# Altium PCB PCB_rp2040ArtDriver_2022-06-08.pcbdoc
Units mil, origin at the board's own origin, x right, y up, seen from the top; angles counter-clockwise.
Board outline 3205 x 2595 mil, 2 copper layers (Top Layer, Bottom Layer); 5 components, 12 nets, 41 pads, 7 vias.
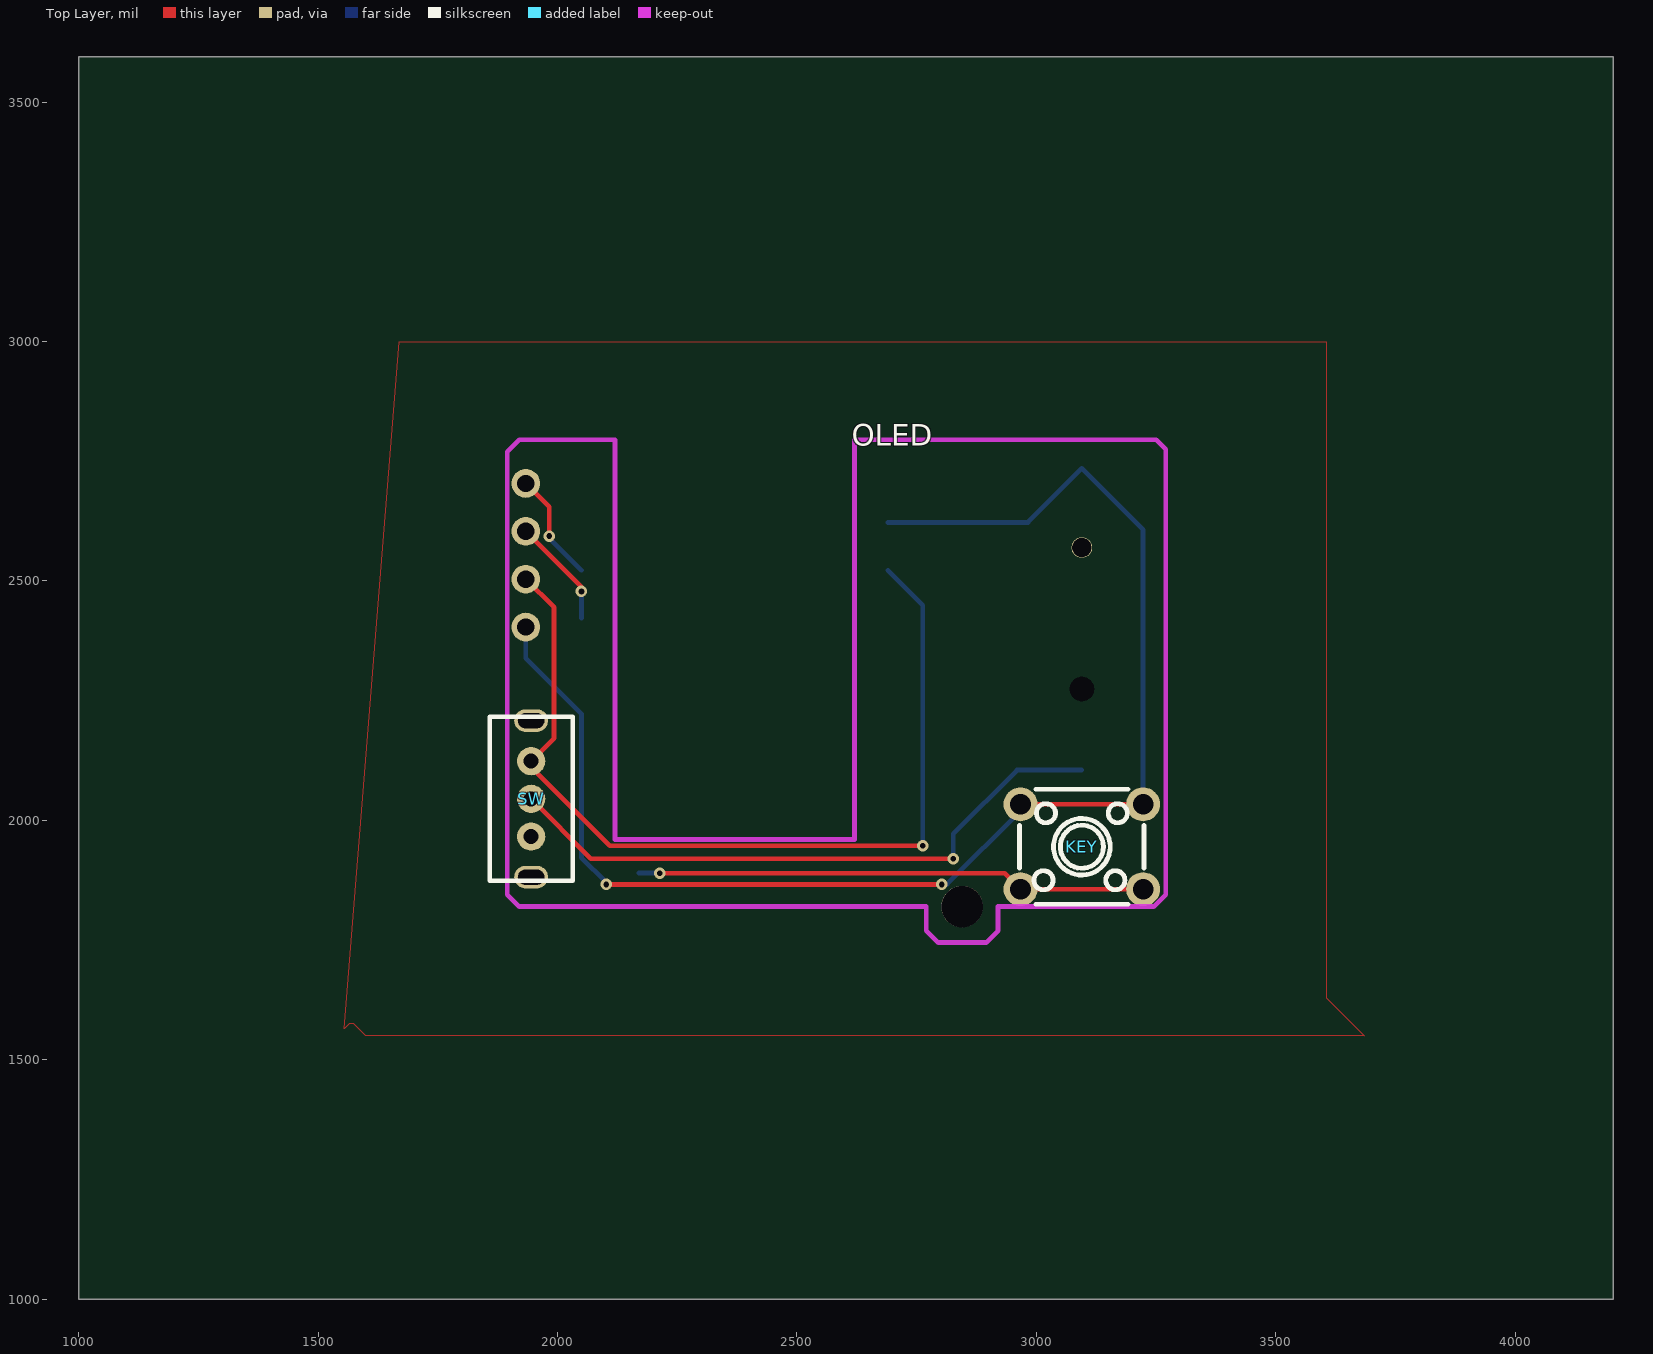
[diagram p0: Top Layer view]
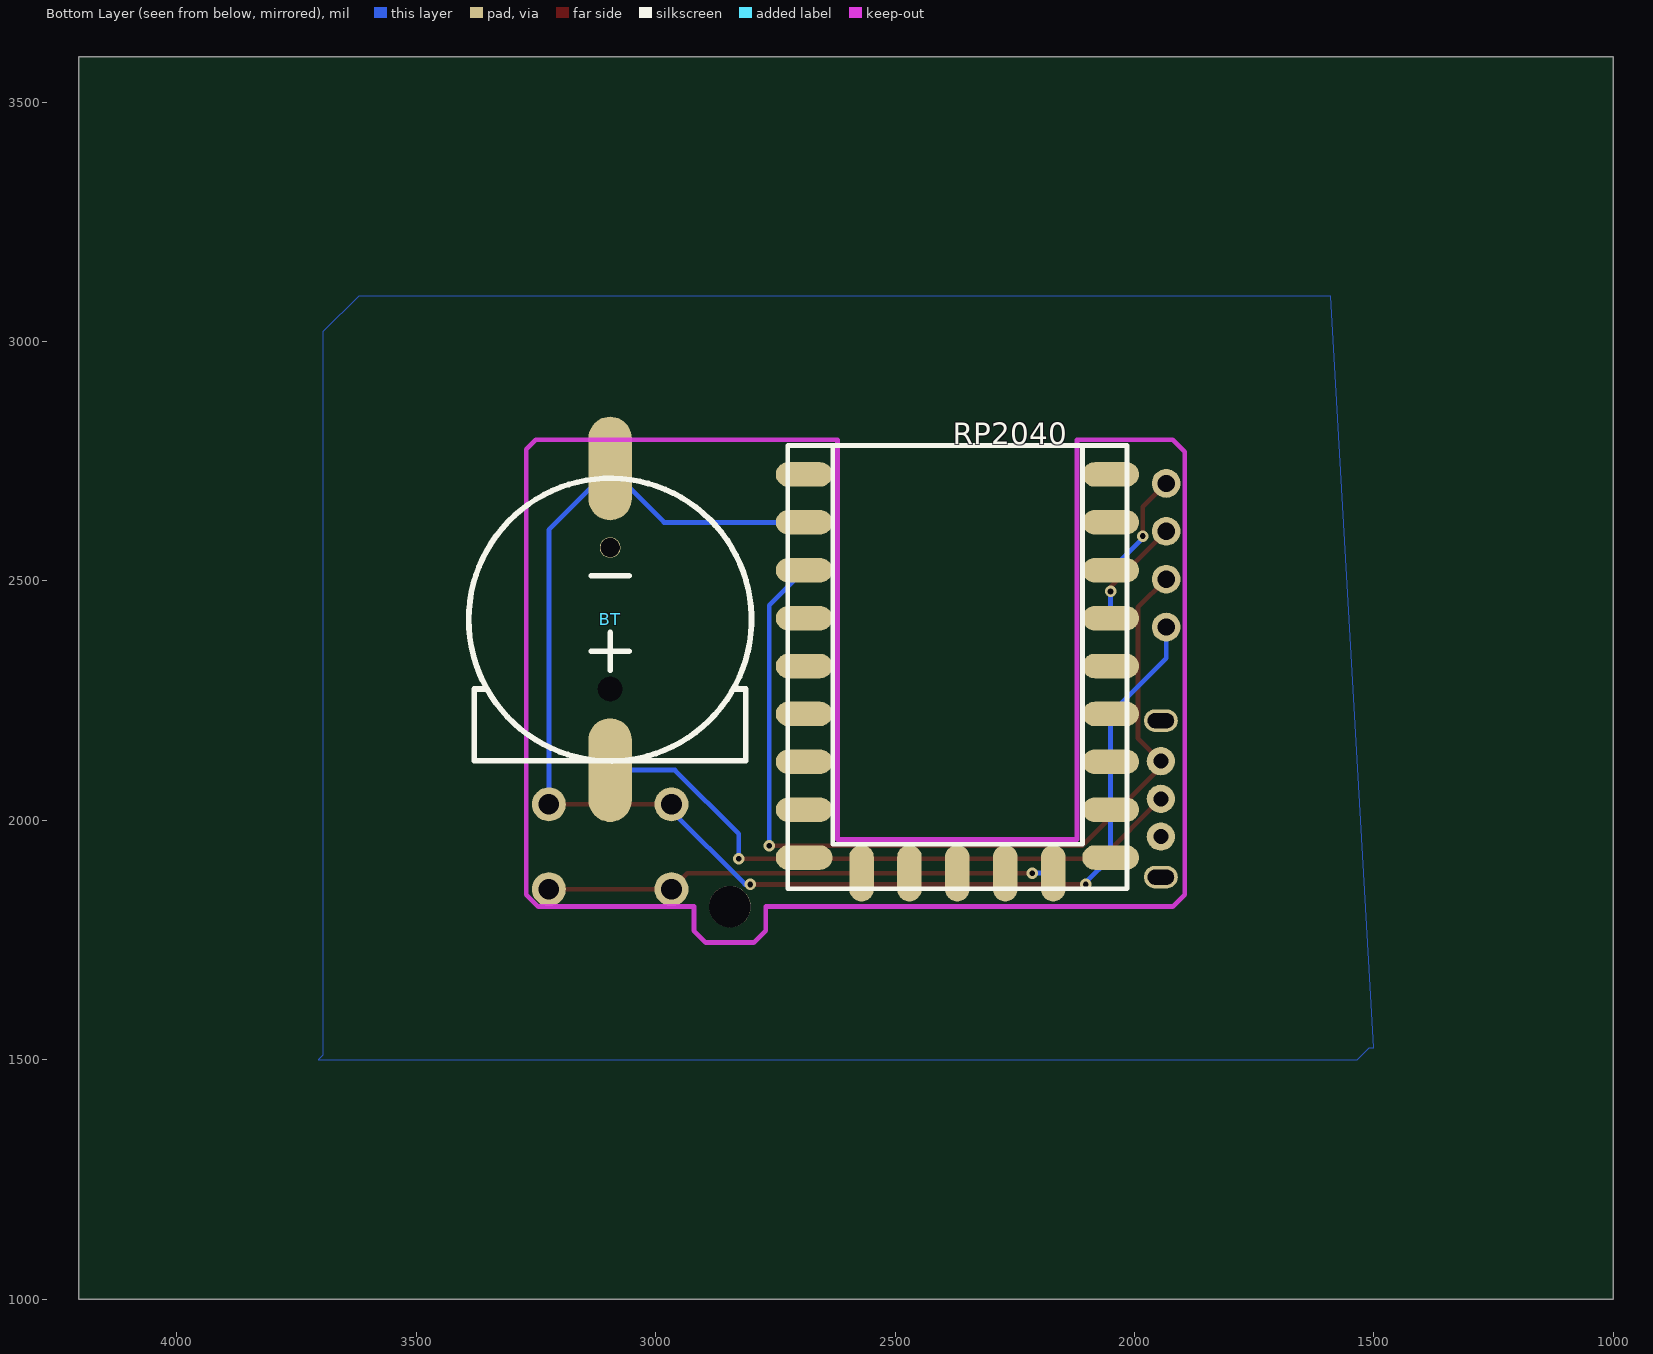
[diagram p1: Bottom Layer view, seen from below]

## Layer stack, top to bottom
Top Layer: signal copper (thickness not stored)
Dielectric: dielectric 12.6, FR-4, Dk 4.8
Bottom Layer: signal copper (thickness not stored)

## Board outline
4205,1000 1000,1000 1000,3595 4205,3595

## Components (designator, comment, footprint, x,y, rotation, side; value= is the part's Value field where it differs from the comment)
BT "BS-1220-2" BS-1220-2 3095,2420 r90 bottom
KEY "K4-6×6_TH" KEY-TH_4P-L6.0-W6.0-P4.50-LS6.5 3095,1945 r0 top
OLED "0.91OLED-4P-IIC" OLED-0.91-2.54*4P-IIC 2595,2595 r0 top
RP2040 "RP2040-Zero" RP2040-ZERO 2370,2320 r0 bottom
SW "SS-12D07G3" "J-SS 12D07" 1945,2045 r0 top

## Footprints (in the part's own frame and the unit in brackets; to place one, negate y for a bottom-side part, rotate by r counter-clockwise, add the part's x,y. Pads: shape width x height; smd on the part's side, far side on the other; paste and mask are expansions set on the pad)
BS-1220-2 [mm]
  oval 5.5x2.3 smd: 1(-8,0) 2(8,0)
  round 1.1 hole 1.3 slot 1.305 at 0 deg unplated: 3(-3.7,0)
  round 1.1 hole 1 slot 1.005 at 0 deg unplated: 4(3.8,0)
  silkscreen extent -7.52,-7.5 7.48,7.5
"J-SS 12D07" [mm]
  round 1.5 hole 0.8: 1(0,1.999) 2(0,0) 3(0,-1.999)
  oval 1.8x1.2 hole 0.8 slot 1.4 at 0 deg: ""(0,-4.15) ""(0,4.15)
  silkscreen extent -2.2,-4.35 2.2,4.35
KEY-TH_4P-L6.0-W6.0-P4.50-LS6.5 [mm]
  round 1.8 hole 1.1: 1(-3.251,-2.25) 2(3.251,-2.25) 3(3.251,2.25) 4(-3.251,2.25)
  silkscreen extent -3.3,-3.05 3.3,3.05
OLED-0.91-2.54*4P-IIC [mil]
  round 60 hole 35.83: 1(-661.1,-191.26) 2(-661.1,-91.26) 3(-661.1,8.74) 4(-661.1,108.74)
RP2040-ZERO [mm]
  oval 3x1.3 smd: 1(-8.128,-10.221) 2(-8.128,-7.681) 3(-8.128,-5.141) 4(-8.128,-2.601) 5(-8.128,-0.061) 6(-8.128,2.479) 7(-8.128,5.019) 8(-8.128,7.559) 9(-8.128,10.099) 15(8.128,10.099) 16(8.128,7.559) 17(8.128,5.019) 18(8.128,2.479) 19(8.128,-0.061) 20(8.128,-2.601) 21(8.128,-5.141) 22(8.128,-7.681) 23(8.128,-10.221)
  oval 1.3x3 smd: 10(-5.08,10.922) 11(-2.54,10.922) 12(0,10.922) 13(2.54,10.922) 14(5.08,10.922)
  silkscreen extent -9,-11.75 9,11.75

## Free pads (board coordinates)
  round 86.61 hole 86.61 unplated: ""(2845,1820)

## Via types
v1: diameter 23.98, hole 12.01, Top Layer to Bottom Layer, tented both sides, 7 vias

## Nets (pads, with @x,y where several pads share a name; then routed paths per layer and width w, separated by ;. In a path a pad name is that pad's centre, name@x,y a point inside that pad or via, vN(x,y) a via of type N, cw(c..) or ccw(c..) an arc to the next point about the centre after c; other vN are vias at no path point)
GND: BT.2 KEY.3 KEY.4 OLED.1 RP2040.6 RP2040.7 RP2040.8 RP2040.9 RP2040.22 | length 3011.3
  Top Layer w10: v1(2101.69,1866.36) v1(2802.58,1866.36) ; KEY.4 KEY.3
  Bottom Layer w10: OLED.1 1933.9,2338.49 RP2040.6 RP2040.7 RP2040.8 RP2040.9 2101.69,1870.7 v1(2101.69,1866.36) ; RP2040.22 2982.43,2622.39 BT.2 3223,2606.96 KEY.3 ; v1(2802.58,1866.36) 2813.14,1866.36 2967,2020.22 KEY.4
KEY1: KEY.1 KEY.2 RP2040.10 | length 1066.9
  Top Layer w10: v1(2213.6,1889.8) 2933.6,1889.8 KEY.1 KEY.2
  Bottom Layer w10: RP2040.10 2213.41,1889.99 v1(2213.6,1889.8)
S$1804: 
S$1817: 
S$1830: 
S$1834: 
S$13528: 
S$13532: 
SCL: OLED.3 RP2040.4 | length 229.4
  Top Layer w10: OLED.3 2050,2487.64 v1(2050,2478.26)
  Bottom Layer w10: RP2040.4 v1(2050,2478.26)
SDA: OLED.4 RP2040.3 | length 229.4
  Top Layer w10: OLED.4 1982.99,2654.65 v1(1982.99,2593.79)
  Bottom Layer w10: v1(1982.99,2593.79) 1982.99,2589.4 RP2040.3
SW_2: BT.1 SW.2 | length 1308.7
  Top Layer w10: SW.2 2069.97,1920.03 v1(2826.62,1920.03)
  Bottom Layer w10: v1(2826.62,1920.03) 2826.62,1971.79 2959.87,2105.04 BT.1
VCC: OLED.2 RP2040.21 SW.1 | length 1928.1
  Top Layer w10: OLED.2 1992.84,2444.8 1992.84,2171.54 SW.1 1945,2111.16 2108.94,1947.22 v1(2762.97,1947.22)
  Bottom Layer w10: RP2040.21 2762.97,2449.42 v1(2762.97,1947.22)
pads on no net: BT.3 BT.4 RP2040.1 RP2040.2 RP2040.5 RP2040.11 RP2040.12 RP2040.13 RP2040.14 RP2040.15 RP2040.16 RP2040.17 RP2040.18 RP2040.19 RP2040.20 RP2040.23 SW. SW.3

## Polygon pours and split planes (outlines as drawn)
GND on Bottom Layer (solid): 1590,3095 3620,3095 3695,3020 3695,1510 3705,1500 1535,1500 1510,1525 1500,1525
GND on Top Layer (solid): 1670,3000 3605,3000 3605,1630 3685,1550 1600,1550 1575,1575 1565,1575 1555,1565

## Text inside footprints (layer, text, board x,y; h text height)
OLED: Document "12832" at 2415,2510 h80; Document "G" at 1985,2395 h80 r180; Document "V" at 1985,2495 h80 r180; Document "C" at 1985,2600 h80 r180; Document "D" at 1990,2705 h80 r180